# Allegro board iot_node.brd
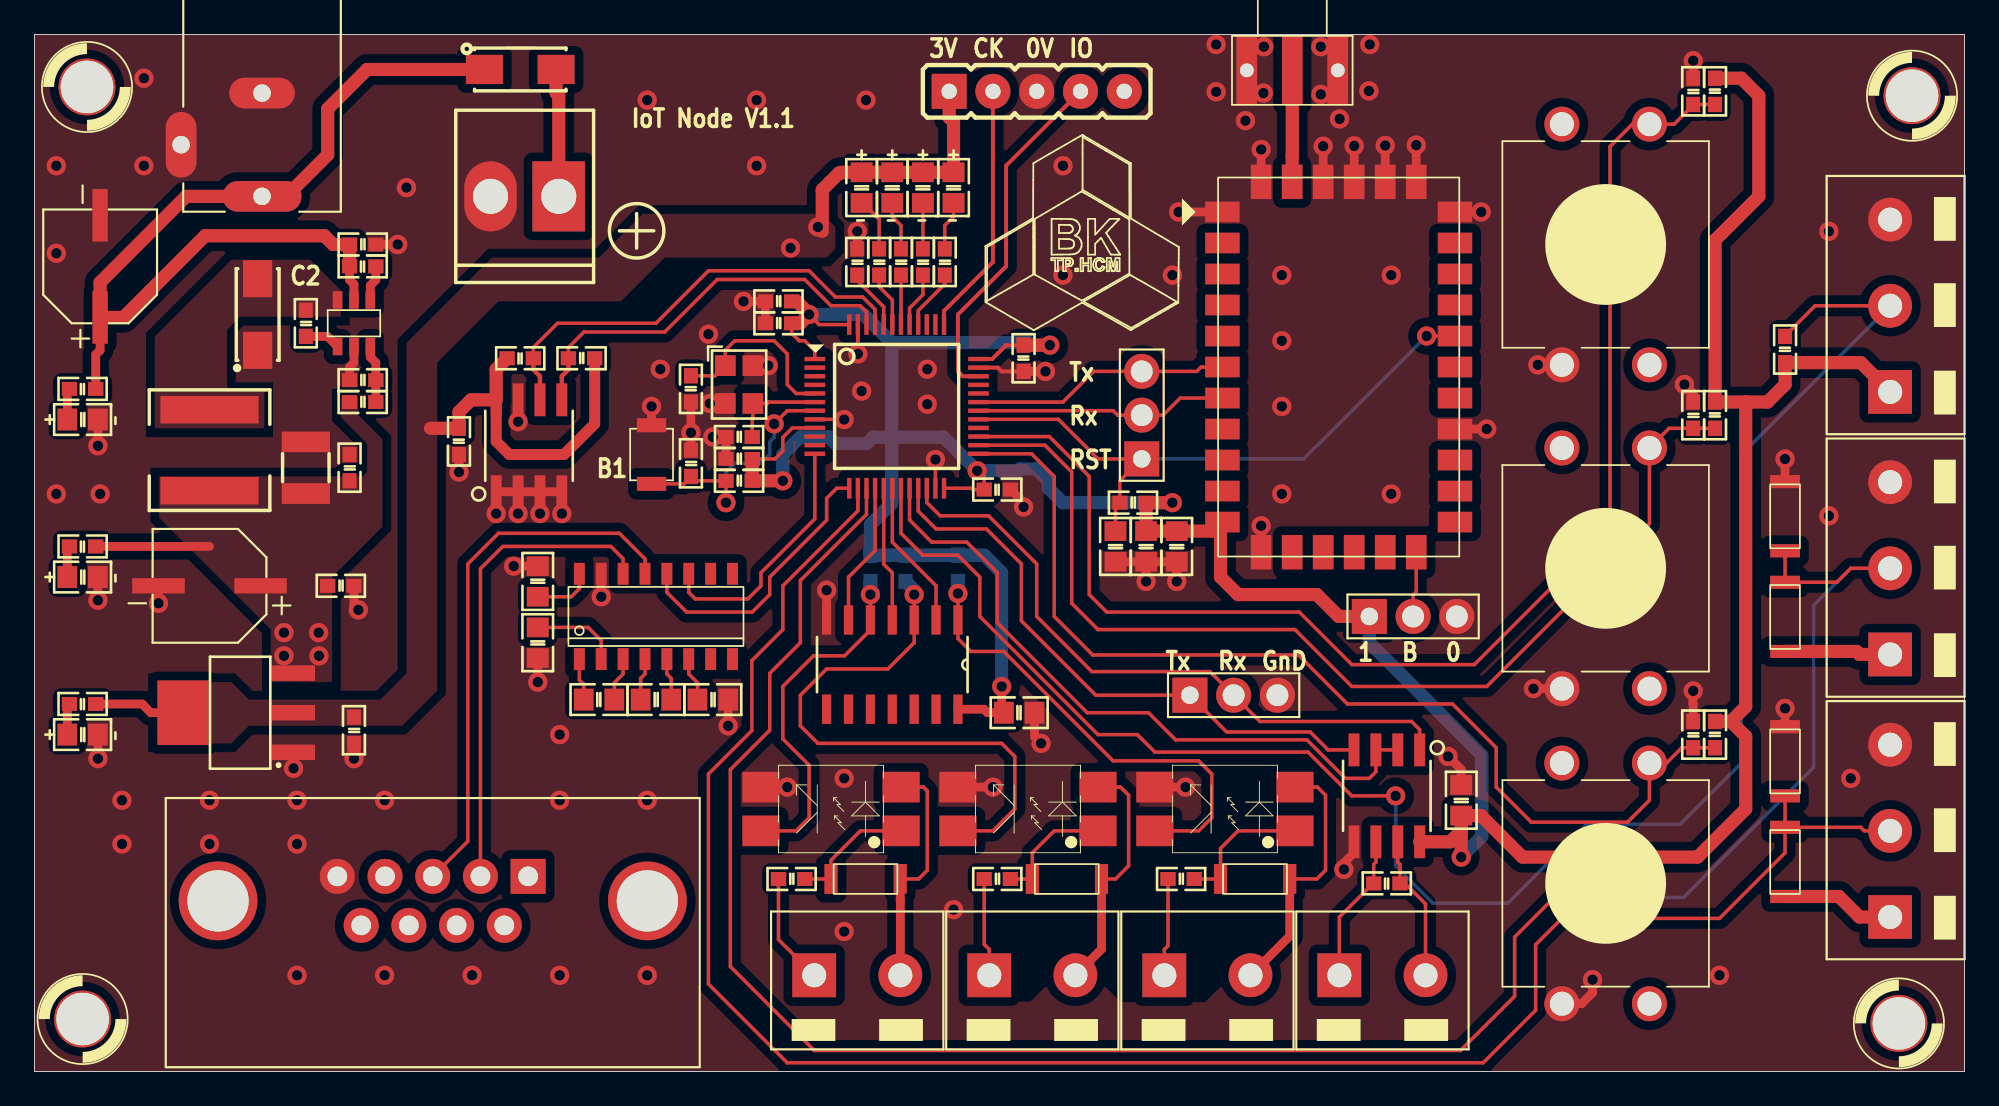
[diagram p0: board, top side]
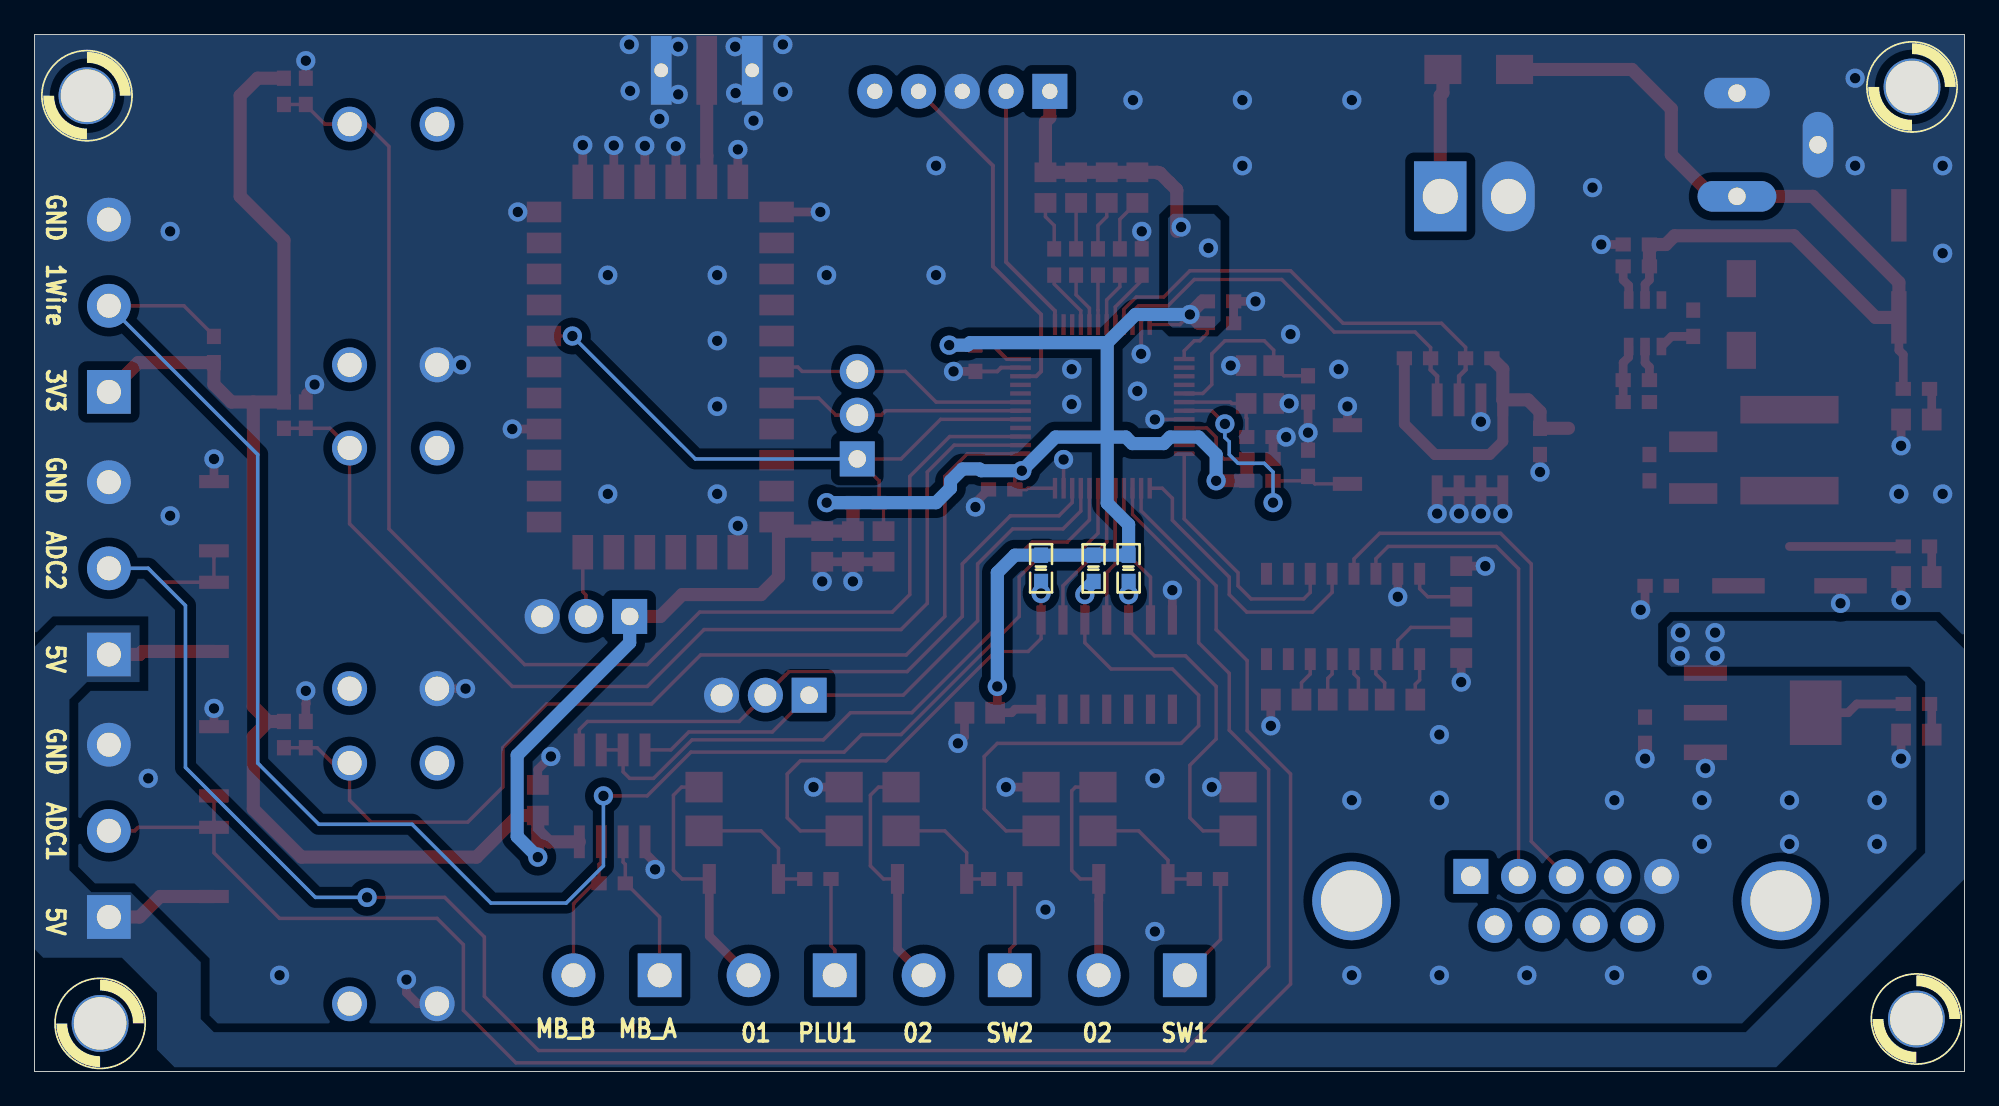
[diagram p1: board, bottom side, seen from below]

Outline 112.01 x 60.2 mm; copper layers: TOP, BOTTOM. Coordinates in mm from the lower left corner of the outline.
Outline path: 0,60.2 0,0 112.01,0 112.01,60.2 0,60.2

## Design rules (mm)
constraint set DEFAULT: min track width 0.203

## Placement (name value [footprint] x y rotation side)
B1  Reset  [B3U-1000P]  35.81 35.81 90 top
C1  10nF  [C0603]  19.05 48.01 180 top
C2  10nF  [C0603]  15.75 43.43 90 top
C3  100uF/35V  [CAP_AL_D]  3.81 46.74 90 top
C4  220u/16V  [CAP_AL_D]  10.16 28.19 180 top
C5  100nF  [C0603]  18.29 35.05 90 top
C6  22u/6.3V  [CAP_1210]  15.75 35.05 90 top
C7  100nF  [C0603]  17.78 28.19 180 top
C8  100nF  [C0603]  18.54 19.81 90 top
C9  0.1uF/6.3V  [C0603]  43.18 44.7 180 top
C10  0.1uF  [C0603]  40.89 35.56 180 top
C11  0.1uF/6.3V  [C0603]  43.18 43.43 180 top
C12  0.1uF/6.3V  [C0603]  55.88 33.78 0 top
C13  0.1uF/6.3V  [C0603]  57.4 41.4 270 top
C14  18pF  [C0603]  38.1 39.62 270 top
C15  18pF  [C0603]  40.89 36.83 180 top
C16  0.1uF/6.3V  [C0603]  96.27 19.56 90 top
C17  0.1uF/6.3V  [C0603]  96.27 38.1 90 top
C18  0.1uF/6.3V  [C0603]  38.1 35.31 90 top
C19  0.1uF/6.3V  [C0603]  96.27 56.9 90 top
C20  0.1uF  [C0805]  82.8 15.75 270 top
C22  0.1uF  [C0805]  57.15 20.83 180 top
C23  4.7uF  [C0805]  66.29 30.48 270 top
C24  0.1uF  [C0805]  64.52 30.48 270 top
C25  0.1uF  [C0805]  62.74 30.48 270 top
C26  0.1uF/6.3V  [C0603]  24.64 36.58 270 top
C34  100nF/25V  [C0805]  29.21 24.89 270 top
C35  100nF/25V  [C0805]  39.37 21.59 0 top
C148  100nF/25V  [C0805]  32.77 21.59 180 top
C149  100nF/25V  [C0805]  36.07 21.59 0 top
C150  100nF/25V  [C0805]  29.21 28.45 90 top
D1  1N4007  [DO214AC_SMA]  28.19 58.17 0 top
D2  1N5819  [DO214AC_SMA]  12.95 43.94 90 top
D3  LED  [LED0805]  2.79 37.85 0 top
D4  LED  [LED0805]  2.79 28.7 0 top
D5  LED  [LED0805]  2.79 19.56 0 top
D6  LED  [LED0805]  53.34 51.31 270 top
D7  LED  [LED0805]  51.56 51.31 270 top
D8  LED  [LED0805]  49.78 51.31 270 top
D9  LED  [LED0805]  48.01 51.31 270 top
D10  1N4007  [SOD80]  101.6 10.16 0 top
D11  1N4007  [SOD80]  101.6 16 0 top
D12  1N4007  [SOD80]  68.83 11.18 270 top
D13  1N4007  [SOD80]  101.6 24.38 0 top
D14  1N4007  [SOD80]  57.91 11.18 270 top
D15  1N4007  [SOD80]  101.6 30.23 0 top
D16  1N4007  [SOD80]  46.23 11.18 270 top
E1  ANTENNA_OPTION1  [SMA_EDGE]  73 58.12 90 top
J1  BAT  [HEADER2-PITCH3P96-B2P_VH]  28.45 50.8 180 top
J2  12VDC  [CONN_JACK_DC]  13.21 50.8 90 top
J3  JTAG/STSW  [HEADER_5]  53.09 56.9 0 top
J4  MCU_DBG  [HEADER3PITCH100MIL]  69.6 21.84 0 top
J6  RS485_SLAVE  [DOMINO2_5]  78.23 5.59 0 top
J7  ANALOG_IN1  [DOMINO3_5]  107.7 13.97 90 top
J8  SW_IN1  [DOMINO2_5]  68.07 5.59 0 top
J9  ANALOG_IN2  [DOMINO3_5]  107.7 29.21 90 top
J10  SW_IN2  [DOMINO2_5]  57.91 5.59 0 top
J11  ONEWIRE  [DOMINO3_5]  107.7 44.45 90 top
J12  PULSE_IN  [DOMINO2_5]  47.75 5.59 0 top
J13  RAK_BOOT  [HEADER3PITCH100MIL]  80.01 26.42 0 top
J14  RAK_DBG  [HEADER3PITCH100MIL]  64.26 38.1 90 top
J15  DB9PORT  [DB9_FE]  23.11 9.91 180 top
L1  8.8uH/1.7A  [IND_6X6MM]  10.16 36.07 270 top
MH1  HOLE 4mm  [MH_3MM_1]  3.05 57.15 0 top
MH2  HOLE 4mm  [MH_3MM_1]  2.79 3.05 0 top
MH3  HOLE 4mm  [MH_3MM_1]  108.2 2.79 0 top
MH4  HOLE 4mm  [MH_3MM_1]  108.97 56.64 0 top
NOREF  -  []  54.86 42.67 0 top
R1  10K  [R0603]  19.05 46.74 0 top
R2  4k7  [R0603]  2.79 39.62 0 top
R3  4k7  [R0603]  2.79 30.48 0 top
R4  4k7  [R0603]  2.79 21.34 0 top
R5  49.9K  [R0603]  19.05 38.86 180 top
R6  10K  [R0603]  19.05 40.13 180 top
R7  4k7  [R0603]  47.75 46.99 90 top
R8  4k7  [R0603]  52.83 46.99 90 top
R9  4k7  [R0603]  51.56 46.99 90 top
R10  4k7  [R0603]  50.29 46.99 90 top
R11  4k7  [R0603]  49.02 46.99 90 top
R12  4.7K  [R0603]  40.89 34.29 180 top
R13  10K  [R0603]  97.54 19.56 270 top
R14  10K  [R0603]  97.54 38.1 270 top
R15  10K  [R0603]  97.54 56.9 270 top
R16  100R  [R0603]  78.49 10.92 0 top
R18  1K  [R0603]  66.55 11.18 180 top
R19  1K  [R0603]  55.88 11.18 180 top
R20  10K  [R0603]  101.6 41.91 270 top
R21  1K  [R0603]  43.94 11.18 180 top
R22  10K  [R0603]  63.75 33.02 180 top
R23  100R  [R0603]  53.59 29.21 270 bottom
R24  100R  [R0603]  50.55 29.21 270 bottom
R25  100R  [R0603]  48.51 29.21 270 bottom
R26  10K  [R0603]  31.75 41.4 180 top
R27  10K  [R0603]  28.19 41.4 0 top
SW1  DETECT SW  [TACT_SWITCH_12X12X7MM_SMD]  91.19 10.92 180 top
SW2  DETECT SW  [TACT_SWITCH_12X12X7MM_SMD]  91.19 29.21 180 top
SW3  DETECT SW  [TACT_SWITCH_12X12X7MM_SMD]  91.19 48.01 180 top
U1  AP3211  [SOT23-6]  18.54 43.43 90 top
U2  LM1117 5V  [SOT-223]  11.94 20.83 0 top
U3  STM32F103C8T6  [LQFP_48]  50.04 38.61 270 top
U5  MAX485  [SOIC-8]  78.49 16 180 top
U6  Opto  [OPTOSMD]  69.09 15.24 90 top
U7  74HC14  [SO_14]  49.78 23.62 270 top
U8  Opto  [OPTOSMD]  57.66 15.24 90 top
U9  Opto  [OPTOSMD]  46.23 15.24 90 top
U10  -  [RAK811]  75.69 40.89 0 top
U11  AT24C02  [SOIC-8]  28.7 36.32 0 top
U12  MAX3232  [SOIC16]  36.07 26.42 90 top
Y1  12M-18ppm  [CRY3225_M]  40.89 39.88 90 top

## Library data of the parts
B1 = SW PUSHBUTTON-SPST-2_0
C1 C2 C7 C8 C20 C22-C25 = CAP NP
C3 C4 = CAP
C5 = Cap 0603
C6 = CAP NP: User Part Number: PartNr
C9-C19 C26 = CAP NP_0
C34 C35 C148-C150 = CAP_USER
D1 D10-D16 = DIODE
D2 = SS34_2
D3-D9 = LED_0
E1 = ANTENNA_1
J1 J6 J8 J10 J12 = HEADER 2
J2 = CONN JACK PWR: User Part Number: X; Tolerance: X
J3 = HEADER 5
J4 J7 J9 J11 J13 J14 = HEADER 3
J15 = DB9PORT
L1 = INDUCTOR
MH1-MH4 = MOUNTING HOLE
R1 R5 R6 = RES-SM0402_0
R2-R4 R7-R11 R13-R16 R18-R27 = Resistor 0603
R12 = RESISTOR_0
SW1-SW3 = SW PUSHBUTTON-SPST-2
U1 = PMIC_SOT23-6
U2 = RT9193-33GB_1
U3 = STM32F103C8T6
U5 = MAX485_1
U6 U8 U9 = Opto
U7 = 74HC14
U10 = RAK811
U11 = AT24C02_0
U12 = MAX3232_0: Tolerance: ***; User Part Number: ***
Y1 = CRYSTAL-4_0

## Footprints (pads in the part's own frame, mm; a bottom-side part is the same pattern mirrored in y, then rotated)
B3U-1000P
  rect 0.813x1.702 smd: 1(-1.702,0) 2(1.702,0)
C0603
  rect 0.889x0.813 smd: 1(-0.762,0) 2(0.762,0)
C0805
  rect 1.143x1.27 smd: 1(-0.889,0) 2(0.889,0)
CAP_1210
  rect 1.2x2.8 smd: 1(-1.5,0) 2(1.5,0)
CAP_AL_D
  rect 3.048x0.889 smd: 1(-2.962,0) 2(2.962,0)
CONN_JACK_DC
  oval 1.778x4.572 hole 1.016: 1(0,0)
  oval 1.778x3.81 hole 1.016: 2(5.994,0)
  oval 3.81x1.778 hole 1.016: 3(2.997,4.699)
CRY3225_M
  rect 1.2x1.2 smd: 1(1.1,0.8) 2(-1.101,0.8) 3(-1.101,-0.8) 4(1.1,-0.8)
DB9_FE
  round 4.572 hole 3.556: (-12.459,0) (12.459,0)
  rect 2.032x2.032 hole 1.143: 1(-5.537,-1.422)
  round 2.032 hole 1.143: 2(-2.769,-1.422) 3(0,-1.422) 4(2.769,-1.422) 5(5.537,-1.422) 6(-4.153,1.422) 7(-1.384,1.422) 8(1.384,1.422) 9(4.153,1.422)
DO214AC_SMA
  rect 2.15x1.696 smd: 1(-2.08,0) 2(2.08,0)
DOMINO2_5
  rect 2.54x2.54 hole 1.397: 1(-2.5,0)
  round 2.54 hole 1.397: 2(2.5,0)
DOMINO3_5
  rect 2.54x2.54 hole 1.397: 1(-5,0)
  round 2.54 hole 1.397: 2(0,0) 3(5,0)
HEADER2-PITCH3P96-B2P_VH
  rect 3.048x4.064 hole 2.032: 1(-1.98,0)
  oval 3.048x4.064 hole 2.032: 2(1.98,0)
HEADER3PITCH100MIL
  rect 2.032x2.032 hole 1.016: 1(-2.54,0)
  round 2.032 hole 1.27: 2(0,0) 3(2.54,0)
HEADER_5
  rect 2.032x2.032 hole 0.889: 1(0,0)
  round 2.032 hole 0.889: 2(2.54,0) 3(5.08,0) 4(7.62,0) 5(10.16,0)
IND_6X6MM
  rect 1.6x5.7 smd: 1(-2.35,0) 2(2.35,0)
LED0805
  rect 1.143x1.27 smd: 1(-0.889,0) 2(0.889,0)
LQFP_48
  rect 0.254x1.2 smd: 1(-2.75,-4.75) 2(-2.25,-4.75) 3(-1.75,-4.75) 4(-1.25,-4.75) 5(-0.75,-4.75) 6(-0.25,-4.75) 7(0.25,-4.75) 8(0.75,-4.75) 9(1.25,-4.75) 10(1.75,-4.75) 11(2.25,-4.75) 12(2.75,-4.75) 25(2.75,4.75) 26(2.25,4.75) 27(1.75,4.75) 28(1.25,4.75) 29(0.75,4.75) 30(0.25,4.75) 31(-0.25,4.75) 32(-0.75,4.75) 33(-1.25,4.75) 34(-1.75,4.75) 35(-2.25,4.75) 36(-2.75,4.75)
  rect 1.2x0.254 smd: 13(4.75,-2.75) 14(4.75,-2.25) 15(4.75,-1.75) 16(4.75,-1.25) 17(4.75,-0.75) 18(4.75,-0.25) 19(4.75,0.25) 20(4.75,0.75) 21(4.75,1.25) 22(4.75,1.75) 23(4.75,2.25) 24(4.75,2.75) 37(-4.75,2.75) 38(-4.75,2.25) 39(-4.75,1.75) 40(-4.75,1.25) 41(-4.75,0.75) 42(-4.75,0.25) 43(-4.75,-0.25) 44(-4.75,-0.75) 45(-4.75,-1.25) 46(-4.75,-1.75) 47(-4.75,-2.25) 48(-4.75,-2.75)
MH_3MM_1
  round 3.302 hole 3.048: 1(0,0)
OPTOSMD
  rect 1.778x2.159 smd: 1(-1.27,-4.064) 2(1.27,-4.064) 3(1.27,4.064) 4(-1.27,4.064)
R0603
  rect 0.889x0.813 smd: 1(-0.762,0) 2(0.762,0)
RAK811
  rect 2x1.2 smd: 1(-6.75,9) 2(-6.75,7.2) 3(-6.75,5.4) 4(-6.75,3.6) 5(-6.75,1.8) 6(-6.75,0) 7(-6.75,-1.8) 8(-6.75,-3.6) 9(-6.75,-5.4) 10(-6.75,-7.2) 11(-6.75,-9) 18(6.75,-9) 19(6.75,-7.2) 20(6.75,-5.4) 21(6.75,-3.6) 22(6.75,-1.8) 23(6.75,0) 24(6.75,1.8) 25(6.75,3.6) 26(6.75,5.4) 27(6.75,7.2) 28(6.75,9)
  rect 1.2x2 smd: 12(-4.5,-10.75) 13(-2.7,-10.75) 14(-0.9,-10.75) 15(0.9,-10.75) 16(2.7,-10.75) 17(4.5,-10.75) 29(4.5,10.75) 30(2.7,10.75) 31(0.9,10.75) 32(-0.9,10.75) 33(-2.7,10.75) 34(-4.5,10.75)
SMA_EDGE
  rect 4x1.2 hole 0.8: 1(0,2.64) 3(0,-2.64)
  rect 4x1.2 smd: 2(0,0)
SO_14
  rect 1.702x0.533 smd: 1(-2.591,3.81) 2(-2.591,2.54) 3(-2.591,1.27) 4(-2.591,0) 5(-2.591,-1.27) 6(-2.591,-2.54) 7(-2.591,-3.81) 8(2.591,-3.81) 9(2.591,-2.54) 10(2.591,-1.27) 11(2.591,0) 12(2.591,1.27) 13(2.591,2.54) 14(2.591,3.81)
SOD80
  rect 1.727x0.762 smd: 1(0,0) 2(-0.004,4.016)
SOIC16
  rect 1.27x0.635 smd: 1(-2.477,4.445) 2(-2.477,3.175) 3(-2.477,1.905) 4(-2.477,0.635) 5(-2.477,-0.635) 6(-2.477,-1.905) 7(-2.477,-3.175) 8(-2.477,-4.445) 9(2.477,-4.445) 10(2.477,-3.175) 11(2.477,-1.905) 12(2.477,-0.635) 13(2.477,0.635) 14(2.477,1.905) 15(2.477,3.175) 16(2.477,4.445)
SOIC-8
  rect 0.635x1.905 smd: 1(-1.905,-2.667) 2(-0.635,-2.667) 3(0.635,-2.667) 4(1.905,-2.667) 5(1.905,2.667) 6(0.635,2.667) 7(-0.635,2.667) 8(-1.905,2.667)
SOT23-6
  rect 1.016x0.559 smd: 1(-1.35,0.95) 2(-1.35,0) 3(-1.35,-0.95) 4(1.35,-0.95) 5(1.35,0) 6(1.35,0.95)
SOT-223
  rect 2.5x0.9 smd: 1(3.1,-2.3) 2(3.1,0) 3(3.1,2.3)
  rect 3x3.75 smd: 4(-3.3,0)
TACT_SWITCH_12X12X7MM_SMD
  round 2.032 hole 1.397: 1(-2.54,-6.985) 2(-2.54,6.985) 3(2.54,-6.985) 4(2.54,6.985)

## Nets
GND: B1.2 C1.1 C3.2 C4.2 C5.2 C6.2 C7.1 C8.1 C9.2 C10.2 C11.2 C12.2 C13.2 C14.2 C15.2 C16.2 C17.2 C18.2 C19.2 C20.1 C22.1 C23.2 C24.2 C25.2 C26.2 C34.2 C35.2 C150.2 D2.1 D3.2(CATHODE) D4.2(CATHODE) D5.2(CATHODE) D11.2 D15.2 E1.1 E1.3(GND_2) J1.2 J2.2 J2.3 J3.3 J4.3 J7.3 J9.3 J11.3 J13.3 J15.5 R6.2 R7.2 SW1.4 SW2.4 SW3.4 U1.2 U2.1 U3.8 U3.23 U3.35 U3.47(VSS__2) U5.5 U6.3 U7.7 U8.3 U9.3 U10.1 U10.12 U10.21 U10.28 U10.29 U10.30 U10.31 U10.32 U10.34 U11.1 U11.2 U11.3 U11.4 U11.7(WP) U12.15 Y1.2 Y1.4
VCC3.3V: C8.2 C9.1 C10.1 C11.1 C12.1 C13.1 C20.2 C22.2 C23.1 C24.1 C26.1 D6.1 D7.1 D8.1 D9.1 J3.1 J11.1 J13.1 R4.2 R12.1 R13.1 R14.1 R15.1 R20.2 R22.1 R23.1 R24.1 R25.1 R26.1 R27.1 U2.2 U2.4 U3.1 U3.9 U3.24 U3.36 U3.48 U5.8(VCC) U7.14(VCC) U10.11(VCC) U11.8
VCC3V3: C150.1 U12.16(VCC)
VCC5V: C4.1 C5.1 C6.1 C7.2 D10.1(K) D13.1(K) J7.1 J9.1 L1.2 R3.2 R5.2 U2.3(VIN)
VIN: C1.2 C3.1 D1.1(K) J2.1 R1.1 R2.2 U1.5
BOOT0: J13.2 U10.17
GPIO_BTN_0: C16.1 R13.2 SW1.1 U3.25
GPIO_BTN_1: C17.1 R14.2 SW2.1 U3.26
GPIO_BTN_2: C19.1 R15.2 SW3.1 U3.27
GPIO_LED_0: R8.1 U3.40
GPIO_LED_1: R9.1 U3.41
GPIO_LED_2: R10.1 U3.42
GPIO_LED_3: R11.1 U3.43
I2C1_SCL: R27.2 U3.45 U11.6
I2C1_SDA: R26.2 U3.46 U11.5
JTCK-SWCLK: J3.2 U3.37
JTMS-SWDIO: J3.4 U3.34
LIGHT_SEN_ADC: U3.10
NRST: B1.1 C18.1 R12.2 U3.7
OPTO_PULSE: R25.2 U7.5 U9.4
OPTO_SW_1: R23.2 U6.4 U7.1
OPTO_SW_2: R24.2 U7.3 U8.4
PULSE_IN: U3.16 U7.6
RAK811_RST: C25.1 J14.1 R22.2 U3.29 U10.24
RAK811_RX: J14.2 U3.30 U10.7
RAK811_TX: J14.3 U3.31 U10.6
RF_OUT: E1.2 U10.33
RS485_A_SLAVE: J6.1 R16.1 U5.6
RS485_B_SLAVE: J6.2 R16.2 U5.7
RS485_DI_MASTER: U3.12 U12.11
RS485_DI_SLAVE: J4.1 U3.21 U5.4
RS485_RDE_MASTER: U3.11
RS485_RDE_SLAVE: U3.20 U5.2 U5.3
RS485_RO_MASTER: U3.13 U12.12
RS485_RO_SLAVE: J4.2 U3.22 U5.1
RX2: J15.3(TD) U12.13
SEN_ADC_1: D10.2 D11.1(K) J7.2 U3.14
SEN_ADC_2: D13.2 D15.1(K) J9.2 U3.15
SEN_ONEWIRE: J11.2 R20.1 U3.19
SW_IN_1: U3.18 U7.2
SW_IN_2: U3.17 U7.4
TX2: J15.2 U12.14
N8027159: D1.2 J1.1
N8037733: C15.1 U3.6 Y1.3(XOUT)
N8037737: C14.1 U3.5 Y1.1
N8037917: U3.32
N8065468: R7.1 U3.44
N8080354: D14.2 J10.2 U8.2
N8080372: D12.2 J8.2 U6.2
N8080772: D12.1(K) R18.1 U6.1
N8086219: J8.1 R18.2
N8086247: J10.1 R19.2
N8086295: D14.1(K) R19.1 U8.1
N8093255: C2.1 U1.1
N8093259: C2.2 D2.2(CATHODE) L1.1 U1.6(SW)
N8093419: R1.2 U1.4
N8093431: R5.1 R6.1 U1.3
N8094931: D4.1 R3.1
N8095077: D3.1 R2.1
N8099397: J12.1 R21.2
N8099405: D16.1(K) R21.1 U9.1
N8099429: D16.2 J12.2 U9.2
N8122117: D5.1 R4.1
N8137573: C148.1 U12.3
N8137581: C148.2 U12.1
N8137619: C149.1 U12.4
N8137647: C149.2 U12.5
N8137659: C34.1 U12.2
N8137671: C35.1 U12.6
N81264481: D6.2(CATHODE) R8.2
N81264641: D7.2(CATHODE) R9.2
N81264801: D8.2(CATHODE) R10.2
N81264961: D9.2(CATHODE) R11.2

Pads without a net: J3 5; J15 1 4 6 7 8 9; MH1 1; MH2 1; MH3 1; MH4 1; SW1 2 3; SW2 2 3; SW3 2 3; U3 2 3 4 28 33 38 39; U7 8 9 10 11 12 13; U10 2 3 4 5 8 9 10 13 14 15 16 18 19 20 22 23 25 26 27; U12 7 8 9 10

## Via types
v1: diameter 1.118, hole 0.61, TOP to BOTTOM, 134 vias

## Routing (per net, layer and track width the routed paths; a pad name or vN(x,y) marks a point on that pad's centre or on a via; arc(x,y) is an arc through that point)
GND: length 99
  TOP w0.203: v1(46.99,37.85) 46.71,37.85 46.7,37.86 U3.8 ; U3.23 v1(52.29,35.52)
  TOP w0.229: U3.35 55.92,40.86 56.13,40.64 C13.2 ; U3.47 v1(47.79,41.66)
  TOP w0.508: C24.2 v1(64.52,28.45) ; C24.2 C23.2 v1(66.29,28.45) ; C24.2 C25.2 ; v1(57.4,32.77) 57.4,33.02 C12.2 ; U10.30 v1(78.39,53.75) ; U10.31 v1(76.59,53.73) ; C35.2 v1(40.26,20.07) ; D3.2 v1(3.68,36.32) ; U10.29 v1(80.19,53.78) ; v1(58.42,19.05) 58.04,19.43 C22.1 ; 29.34,33.65 U11.4 v1(30.61,32.38) ; 29.34,33.65 v1(29.34,32.38) ; 29.34,33.65 U11.2 ; C34.2 v1(29.21,22.61) ; C18.2 v1(38.1,37.08) C14.2 ; U11.2 U11.1 v1(26.8,32.38) ; U11.2 v1(28.07,32.38) ; U10.34 v1(71.19,53.52) ; Y1.4 v1(42.59,40.98) ; B1.2 v1(35.81,38.61) ; U9.3 v1(43.69,16.51) ; R6.2 18.29,40.89 18.54,41.15 U1.2 ; C11.2 C9.2 v1(41.15,44.7) ; U10.28 v1(83.96,49.89) ; C17.2 96.27,39.37 v1(95.76,39.88) ; U10.32 v1(74.79,53.71) ; SW1.4 89.79,3.94 90.42,4.57 v1(90.42,5.33) ; U10.12 v1(71.19,31.68) ; C10.2 C15.2 v1(39.37,36.83) ; C26.2 v1(24.64,34.8) ; D15.2 v1(101.6,35.56) ; v1(18.8,26.8) 18.54,27.05 C7.1 ; D5.2 v1(3.68,18.16) ; SW3.4 v1(87.25,41.02) ; D4.2 v1(3.68,27.36) ; U6.3 v1(66.8,16.51) ; v1(96.27,22.1) 96.24,22.08 96.24,21.36 96.27,21.34 C16.2 ; U11.7 v1(28.07,37.72) ; U12.15 v1(32.89,27.56) ; U2.1 v1(15.04,17.6) ; v1(75.99,11.73) 75.99,12.11 76.58,12.7 U5.5 ; C19.2 v1(96.27,58.67) ; v1(82.04,18.29) 82.8,17.53 C20.1 ; C1.1 v1(21.08,48.01) ; U8.3 v1(55.63,16.51) ; U10.21 v1(84.28,37.29) ; C4.2 v1(7.2,27.18) ; U7.7 v1(45.97,27.94) ; Y1.2 v1(39.2,38.78) ; D11.2 v1(101.6,21.08) ; SW2.4 v1(87,22.23) ; U10.1 v1(66.4,49.89) ; R7.2 v1(47.75,48.77) ; C13.2 v1(58.67,40.64) ; C150.2 v1(27.81,29.34) ; C8.1 v1(18.54,18.16)
  vias: v1(1.27,52.58) v1(1.27,47.5) v1(1.27,33.53) v1(3.81,33.53) v1(5.08,15.75) v1(5.08,13.21) v1(6.35,57.66) v1(6.35,52.58) v1(10.16,15.75) v1(10.16,13.21) v1(15.24,15.75) v1(15.24,13.21) v1(15.24,5.59) v1(20.32,15.75) v1(20.32,5.59) v1(21.59,51.31) v1(25.4,5.59) v1(30.48,19.56) v1(30.48,15.75) v1(30.48,5.59) v1(35.56,56.39) v1(35.56,15.75) v1(35.56,5.59) v1(36.32,40.77) v1(39.12,42.8) v1(41.91,56.39) v1(41.91,52.58) v1(46.99,17.02) v1(46.99,8.13) v1(48.01,39.5) v1(48.26,56.39) v1(51.82,40.77) v1(51.82,38.73) v1(53.34,9.4) v1(59.69,52.58) v1(59.69,46.23) v1(66.04,46.23) v1(68.58,59.61) v1(68.58,56.87) v1(70.28,55.19) v1(71.32,56.79) v1(71.35,59.49) v1(72.39,46.23) v1(72.39,42.42) v1(72.39,38.61) v1(72.39,33.53) v1(74.65,59.49) v1(74.65,56.72) v1(75.74,55.3) v1(77.5,59.61) v1(77.44,56.92) v1(78.74,46.23) v1(78.74,33.53) v1(97.79,5.59) v1(104.14,48.77) v1(104.14,32.26) v1(105.41,17.02)
VCC3.3V: length 259.6
  TOP w0.203: U3.48 45.54,43.36 v1(44.96,43.94) ; v1(54.71,34.87) 54.91,34.87 55.12,34.67 C12.1 54.44,33.78 54.37,33.86 U3.24 ; U3.1 45.29,41.83 44.7,42.42 44.38,42.42 43.94,42.86 C11.1 ; C10.1 42.98,35.56 43.43,36.02 43.43,36.81 43.99,37.36 U3.9
  TOP w0.229: C13.1 56.39,42.16 55.58,41.36 U3.36
  TOP w0.508: v1(56.13,22.35) 56.13,20.96 C22.2 55.31,20.83 55.11,21.03 U7.14 ; R4.2 6.25,21.34 6.76,20.83 U2.4
  TOP w0.635: U11.8 26.8,36.58 27.56,35.81 30.73,35.81 32.51,37.59 R26.1
  TOP w0.762: 82.8,13.97 82.17,13.34 U5.8 ; 82.8,13.97 v1(82.8,12.45) ; 82.8,13.97 C20.2 83.95,14.86 86.36,12.45 96.52,12.45 99.31,15.24 99.31,19.46 98.45,20.32 ; J3.1 53.09,55.37 53.34,55.12 53.34,52.2 46.86,52.2 46.82,52.15 46.71,52.15 46.7,52.15 46.68,52.14 46.13,51.59 46.13,51.59 45.76,51.22 45.74,51.2 45.73,51.17 45.72,51.16 45.72,51.12 45.72,48.77 ; 68.83,31.79 U10.11 ; 68.83,31.79 68.42,31.37 C23.1 C24.1 R22.1 v1(66.04,33.02) ; 68.83,31.79 68.83,28.7 69.85,27.69 74.42,27.69 75.69,26.42 J13.1 ; J11.1 106,41.15 R20.2 101.6,39.88 100.58,38.86 99.31,38.86 ; v1(43.43,34.29) R12.1 C10.1 ; 98.45,20.32 R13.1 ; 98.45,20.32 99.31,21.18 99.31,38.86 ; 99.31,38.86 R14.1 97.54,48.26 100.08,50.8 100.08,56.64 99.06,57.66 R15.1 ; C11.1 44.45,43.43 v1(44.96,43.94) 44.96,43.99 44.24,44.7 C9.1 ; R27.1 26.8,40.77 U11.8 25.34,38.99 24.64,38.29 C26.1 22.99,37.34 ; C13.1 v1(58.93,42.16)
  BOTTOM w0.762: v1(56.13,22.35) 56.13,28.96 55.12,29.97 R23.1 R24.1 R25.1 48.51,31.75 49.75,32.99 49.75,36.83 ; 49.75,36.83 48.68,36.83 48.3,36.45 46.48,36.45 46.1,36.83 44.45,36.83 43.43,35.81 v1(43.43,34.29) ; 49.75,36.83 52.76,36.83 v1(54.71,34.87) 57.06,34.87 57.16,34.98 58.15,34.98 58.85,34.28 58.85,33.86 59.69,33.02 v1(66.04,33.02) ; 49.75,36.83 49.75,42.31 ; v1(44.96,43.94) 48.12,43.94 49.75,42.31 ; v1(82.8,12.45) 84,13.64 84,18.36 77.47,24.89 J13.1 ; v1(58.93,42.16) 57.86,42.16 57.72,42.31 49.75,42.31
  vias: v1(43.88,47.8) v1(45.47,49.02)
VCC3V3: length 3.5
  TOP w0.203: U12.16 31.62,28.03 31.15,27.56 C150.1
VCC5V: length 19.4
  TOP w0.508: 10.16,30.48 R3.2
  TOP w0.762: J7.1 105.92,8.97 104.73,10.16 D10.1 ; D13.1 105.74,24.38 105.92,24.21 J9.1
  vias: v1(14.48,25.48) v1(14.48,24.13) v1(16.49,25.48) v1(16.51,24.13)
VIN: length 55.3
  TOP w0.508: R2.2 3.56,41.61 3.81,41.87 C3.1 ; R1.1 18.29,45.95 18.54,45.69 U1.5
  TOP w0.762: R1.1 C1.2 17.34,48.01 16.83,48.51 9.91,48.51 5.17,43.77 C3.1 3.81,45.81 8.8,50.8 J2.1 14.61,50.8 17.02,53.21 17.02,55.88 19.3,58.17 D1.1
BOOT0: length 3.8
  TOP w0.203: J13.2 80.01,27.66 80.19,27.84 U10.17
GPIO_BTN_0: length 60.8
  TOP w0.203: R13.2 C16.1 95.61,18.8 94.72,17.91 SW1.1 93.73,15.75 92.46,14.48 86.87,14.48 84.84,16.51 84.84,18.8 82.3,21.34 76.2,21.34 73.36,24.18 61.42,24.18 59.18,26.42 59.18,34.54 57.87,35.86 U3.25
GPIO_BTN_1: length 61.8
  TOP w0.203: U3.26 58.64,36.36 60.2,34.8 60.2,27.18 61.72,25.65 73.15,25.65 76.45,22.35 84.28,22.35 93.73,31.79 SW2.1 94.87,37.34 C17.1 R14.2
GPIO_BTN_2: length 78.7
  TOP w0.203: R15.2 C19.1 96.27,56.1 95.16,54.99 SW3.1 92.74,54.99 91.44,53.7 91.44,31.5 83.57,23.62 76.45,23.62 73.41,26.67 62.23,26.67 61.21,27.69 61.21,34.54 58.9,36.86 U3.27
GPIO_LED_0: length 3.5
  TOP w0.203: U3.40 51.29,44.17 52.83,45.71 R8.1
GPIO_LED_1: length 3.2
  TOP w0.203: U3.41 50.79,44.31 51.56,45.09 R9.1
GPIO_LED_2: length 2.9
  TOP w0.203: R10.1 50.29,44.19 50.29,44.19 U3.42
GPIO_LED_3: length 3.2
  TOP w0.203: U3.43 49.79,44.79 49.02,45.55 R11.1
I2C1_SCL: length 26.7
  TOP w0.203: U3.45 48.79,44.23 48.06,44.96 46.48,44.96 44.96,46.48 39.12,46.48 36.07,43.43 30.35,43.43 28.96,42.04 R27.2
  TOP w0.254: 29.34,38.99 29.34,40.36 28.96,40.74 R27.2
I2C1_SDA: length 23.6
  TOP w0.203: U3.46 48.29,44.09 47.93,44.45 46.23,44.45 44.7,45.97 39.62,45.97 36.58,42.93 31.89,42.93 30.99,42.03 R26.2
  TOP w0.254: R26.2 30.99,40.74 30.61,40.36 U11.5
JTCK-SWCLK: length 14.7
  TOP w0.229: U3.37 52.79,44.15 55.63,46.99 J3.2
JTMS-SWDIO: length 20.5
  TOP w0.229: U3.34 53.88,40.36 53.59,40.64 53.59,43.94 56.39,46.74 56.39,52.58 J3.4
NRST: length 15.2
  TOP w0.203: 38.1,34.51 C18.1 ; 38.1,34.51 38.14,34.51 38.35,34.29 R12.2 v1(40.13,33.02) ; 38.1,34.51 37.71,34.11 B1.1 ; U3.7 43.69,38.36 v1(42.93,37.59)
  BOTTOM w0.203: v1(42.93,37.59) 42.93,36.8 42.67,36.55 42.67,35.81 42.16,35.31 40.64,35.31 40.13,34.8 v1(40.13,33.02)
OPTO_PULSE: length 20.6
  TOP w0.203: U9.4 44.2,13.97 44.96,14.73 44.96,17.78 43.43,19.3 43.43,22.35 45.21,24.13 47.02,24.13 48.51,25.63 U7.5 v1(48.51,27.69)
  BOTTOM w0.762: v1(48.51,27.69) R25.2
OPTO_SW_1: length 27.5
  TOP w0.203: v1(53.59,27.75) U7.1 53.59,25.13 54.34,24.38 56.25,24.38 62.6,18.03 67.56,18.03 68.33,17.27 68.33,14.73 67.56,13.97 U6.4
  BOTTOM w0.762: v1(53.59,27.75) R23.2
OPTO_SW_2: length 33.5
  TOP w0.203: v1(51.05,27.69) U7.3 51.05,24.89 49.53,23.37 45.97,23.37 44.45,21.84 44.45,20.07 45.47,19.05 56.13,19.05 56.9,18.29 56.9,15.24 55.63,13.97 U8.4
  BOTTOM w0.762: v1(51.05,27.69) 51.05,27.94 R24.2
PULSE_IN: length 8.3
  TOP w0.203: U3.16 48.79,30.25 47.24,28.7 U7.6
RAK811_RST: length 36.4
  TOP w0.203: C25.1 62.74,32.77 R22.2 62.99,34.29 J14.1 61.72,35.56 59.42,37.86 U3.29 ; U10.24 v1(80.79,42.69)
  BOTTOM w0.203: J14.1 73.66,35.56 v1(80.79,42.69)
RAK811_RX: length 14.7
  TOP w0.203: U10.7 66.5,39.09 65.51,38.1 J14.2 62.86,38.1 62.61,38.36 U3.30
RAK811_TX: length 15
  TOP w0.203: U3.31 59.69,38.86 61.47,40.64 J14.3 67.46,40.64 67.71,40.89 U10.6
RF_OUT: length 6.5
  TOP w0.762: E1.2 73,53.16 72.99,53.15 U10.33
RS485_A_SLAVE: length 8.6
  TOP w0.203: J6.1 75.73,8.97 77.69,10.92 R16.1 77.72,12.03 77.85,12.15 U5.6
RS485_B_SLAVE: length 8.6
  TOP w0.203: J6.2 80.73,9.73 79.54,10.92 R16.2 79.25,12.03 79.12,12.15 U5.7
RS485_DI_MASTER: length 14.7
  TOP w0.203: U12.11 37.97,27.81 38.35,27.43 41.4,27.43 42.16,28.19 42.16,28.96 45.29,32.08 U3.12
RS485_DI_SLAVE: length 34.3
  TOP w0.203: U5.4 75.08,18.67 74.04,19.71 69.19,19.71 J4.1 61.59,21.84 57.28,26.16 57.28,29.46 55.24,31.5 52.32,31.5 51.29,32.53 U3.21
RS485_RDE_SLAVE: length 39.5
  TOP w0.203: U5.2 U5.3 77.85,17.4 77.47,17.02 76.08,17.02 73.85,19.25 66.23,19.25 64.65,20.83 61.1,20.83 55.88,26.05 55.88,28.96 54.1,30.73 52.07,30.73 50.79,32.02 U3.20
RS485_RO_MASTER: length 16.5
  TOP w0.203: U3.13 46.56,33.86 45.97,33.27 45.97,32 42.67,28.7 42.67,27.69 41.66,26.67 37.85,26.67 36.7,27.81 U12.12
RS485_RO_SLAVE: length 37.9
  TOP w0.203: U3.22 51.79,33.03 52.56,32.26 55.37,32.26 55.39,32.25 57.97,29.66 58.02,29.61 58.17,29.47 58.17,26.42 61.37,23.22 68.22,23.22 68.43,23.01 68.43,23.01 J4.2 71.12,20.32 79.92,20.32 80.39,19.85 U5.1
RX2: length 31.5
  TOP w0.203: J15.3 25.15,13.36 25.15,29.46 26.92,31.24 33.95,31.24 35.43,29.76 U12.13
SEN_ADC_1: length 113.5
  TOP w0.203: D10.2 101.6,12.7 97.79,8.89 88.65,8.89 87.12,7.37 87.12,3.56 84.07,0.51 43.69,0.51 39.12,5.08 39.12,17.27 41.63,19.79 41.63,23.85 43.43,25.65 43.43,28.19 47.79,32.55 U3.14 ; D10.2 101.6,14.56 101.6,14.56 D11.1 ; D10.2 105.99,14.18 106.2,13.97 J7.2
SEN_ADC_2: length 127.7
  TOP w0.203: 101.6,28.4 D13.2 ; 101.6,28.4 104.6,28.4 105.41,29.21 J9.2 ; 101.6,28.4 101.6,29.84 101.6,29.85 D15.1 ; v1(92.71,10.11) 88.2,10.11 85.9,7.81 85.9,4.37 82.75,1.22 45.26,1.22 40.39,6.1 40.39,17.53 42.67,19.81 42.67,23.11 44.45,24.89 44.45,28.5 48.29,32.34 U3.15
  BOTTOM w0.203: J9.2 105.41,29.21 103.25,27.05 103.25,17.65 95.71,10.11 v1(92.71,10.11)
SEN_ONEWIRE: length 104.3
  TOP w0.203: R20.1 101.6,42.71 103.34,44.45 J11.2 ; U3.19 50.29,31.25 51.56,29.97 53.59,29.97 54.86,28.7 54.86,26.42 61.72,19.56 64.01,19.56 65.02,18.54 73.91,18.54 76.45,16 v1(78.99,16)
  BOTTOM w0.203: J11.2 99.06,35.81 99.06,17.91 95.5,14.35 90.09,14.35 85.52,9.78 81.15,9.78 78.99,11.94 v1(78.99,16)
SW_IN_1: length 8.7
  TOP w0.203: U7.2 52.32,28.19 49.79,30.73 U3.18
SW_IN_2: length 7.9
  TOP w0.203: U7.4 49.78,28.96 49.29,29.45 U3.17
TX2: length 27.8
  TOP w0.203: J15.2 25.88,29.18 27.18,30.48 33.45,30.48 34.16,29.77 U12.14
N8027159: length 7.4
  TOP w0.762: D1.2 30.27,56.81 30.43,56.66 J1.1
N8037733: length 5.6
  TOP w0.203: C15.1 41.66,37.91 41.69,37.95 Y1.3 42.52,38.78 42.6,38.86 U3.6
N8037737: length 10.9
  TOP w0.203: C14.1 39.5,40.39 Y1.1 40.09,41.87 40.64,42.42 42.93,42.42 43.69,41.66 43.69,39.88 44.21,39.36 U3.5
N8065468: length 3.5
  TOP w0.203: U3.44 49.29,44.38 47.75,45.92 R7.1
N8080354: length 14.2
  TOP w0.203: U8.2 63.03,16.51 63.5,16.04 63.5,11.94 62.74,11.18 D14.2
  TOP w0.508: D14.2 61.93,7.1 J10.2
N8080372: length 15.2
  TOP w0.203: D12.2 74.43,11.18 74.93,11.68 74.93,16.04 74.46,16.51 U6.2
  TOP w0.508: J8.2 72.85,7.87 D12.2
N8080772: length 8
  TOP w0.203: U6.1 69.85,13.97 68.83,12.95 D12.1 R18.1
N8086219: length 5.7
  TOP w0.203: R18.2 65.79,7.3 65.57,7.09 J8.1
N8086247: length 5.7
  TOP w0.203: J10.1 55.41,7.09 55.12,7.38 R19.2
N8086295: length 7.1
  TOP w0.203: U8.1 59.18,13.97 57.91,12.7 D14.1 R19.1
N8093255: length 2.1
  TOP w0.508: C2.1 17,42.67 U1.1
N8093419: length 2.1
  TOP w0.508: R1.2 19.81,45.95 19.49,45.63 U1.4
N8093431: length 3.4
  TOP w0.508: R5.1 R6.1 19.81,41.15 19.49,41.47 U1.3
N8094931: length 1.8
  TOP w0.508: 1.9,28.7 1.9,30.35 R3.1
N8095077: length 1.8
  TOP w0.508: R2.1 1.9,39.5 1.9,37.85
N8099397: length 6.4
  TOP w0.203: R21.2 43.18,7.66 J12.1
N8099405: length 7.4
  TOP w0.203: R21.1 D16.1 46.23,12.27 47.93,13.97 U9.1
N8099429: length 13.6
  TOP w0.203: D16.2 51.31,11.18 51.82,11.68 51.82,16.29 51.6,16.51 U9.2
  TOP w0.508: D16.2 50.24,9.94 50.25,9.93 J12.2
N8122117: length 1.8
  TOP w0.508: R4.1 1.9,21.21 1.9,19.56
N8137573: length 2.6
  TOP w0.203: C148.1 33.65,22.57 34.16,23.08 U12.3
N8137581: length 2.5
  TOP w0.203: U12.1 31.62,22.73 31.88,22.48 C148.2
N8137619: length 2.5
  TOP w0.203: C149.1 35.18,22.82 35.43,23.08 U12.4
N8137647: length 2.5
  TOP w0.203: C149.2 36.96,22.82 36.7,23.08 U12.5
N8137659: length 5.1
  TOP w0.203: C34.1 32.13,25.78 32.89,25.02 U12.2
N8137671: length 2.6
  TOP w0.203: C35.1 38.48,22.57 37.97,23.08 U12.6
N81264481: length 2.9
  TOP w0.203: R8.2 52.83,49.11 53.34,49.62 D6.2
N81264641: length 2.7
  TOP w0.203: R9.2 D7.2
N81264801: length 2.9
  TOP w0.203: D8.2 49.78,49.62 50.29,49.11 R10.2
N81264961: length 3.1
  TOP w0.203: R11.2 49.02,49.47 48.07,50.42 D9.2

## Copper pours and planes (outline as drawn; the poured copper is in the pictures)
GND on TOP: 0,60.2 112.01,60.2 112.01,0 0,0 ; 26 cut-outs
GND on BOTTOM: 0,60.2 112.01,60.2 112.01,0 0,0 ; 2 cut-outs
VCC3.3V on TOP: 7.11,19.05 11.43,19.05 12.45,20.07 21.34,20.07 23.37,22.1 23.37,41.15 26.92,44.7 34.04,44.7 36.58,47.24 45.97,47.24 46.48,47.75 46.48,49.02 45.72,49.78 35.31,49.78 32.77,47.24 26.54,47.24 21.59,42.29 21.59,23.11 20.07,21.59 12.45,21.59 11.43,22.61 7.11,22.61
VCC3.3V on BOTTOM: 46.23,43.43 46.23,49.53 45.97,49.78 43.56,49.78 43.18,49.4 43.18,43.56 43.56,43.18 45.97,43.18
VCC5V on TOP: 7.24,32.13 7.24,34.54 19.05,34.54 19.3,34.8 19.3,36.45 17.78,37.97 17.78,39.12 18.8,39.12 18.8,38.1 20.19,36.7 20.19,31.62 17.27,28.7 17.27,22.61 13.72,22.61 13.72,25.65
VCC5V on BOTTOM: 3.17,23.5 2.29,22.61 2.29,12.7 12.7,2.29 101.6,2.29 102.36,3.05 102.36,6.35 106.43,10.41 108.71,10.41 109.98,11.68 109.98,21.59 108.97,22.61 105.92,22.61 105.92,25.91 110.74,25.91 112.01,24.64 112.01,7.11 111.51,6.6 106.93,6.6 104.9,4.57 104.9,1.27 103.89,0.25 10.92,0.25 0,11.18 0,24.51 1.65,26.16 16.89,26.16 17.27,25.78 17.27,23.75 17.02,23.5
N8093259 on TOP: 17.78,43.81 17.78,45.34 16,47.12 11.43,47.12 6.99,42.67 6.99,37.34 13.34,37.34 13.34,39.5 11.18,39.5 11.18,43.05 11.94,43.81

## Text on the board
Ref Des/Silkscreen Bottom: SW1 | 02 | SW2 | PLU1 | 01 | MB_A | MB_B | GND | 1Wire | 3V3 | ADC2 | 5V | ADC1
Ref Des/Silkscreen Top: IoT Node V1.1 | 3V | CK | 0V | IO | Tx | Rx | RST | GnD | 1 | B | 0
User.26: FIGURE | FINISHED_SIZE | 24.0 | 31.5 | 35.0 | 40.0 | 50.0 | 55.0 | 80.0 | 120.0 | DRILL CHART: TOP to BOTTOM | ALL UNITS ARE IN MILS | PLATED | QTY | 75 | 2 | 1 | 4 | 3 | 20 | 10 | 6 | 19
